# Altium PCB LoRA_PCB_v2.PcbDoc
Units mm, origin at the board's own origin, x right, y up, seen from the top; angles counter-clockwise.
Board outline 34.29 x 31.77 mm, 2 copper layers (Top Layer, Bottom Layer); 44 components, 37 nets, 134 pads, 155 vias.
Unrouted connection lines stored in the file: 2.
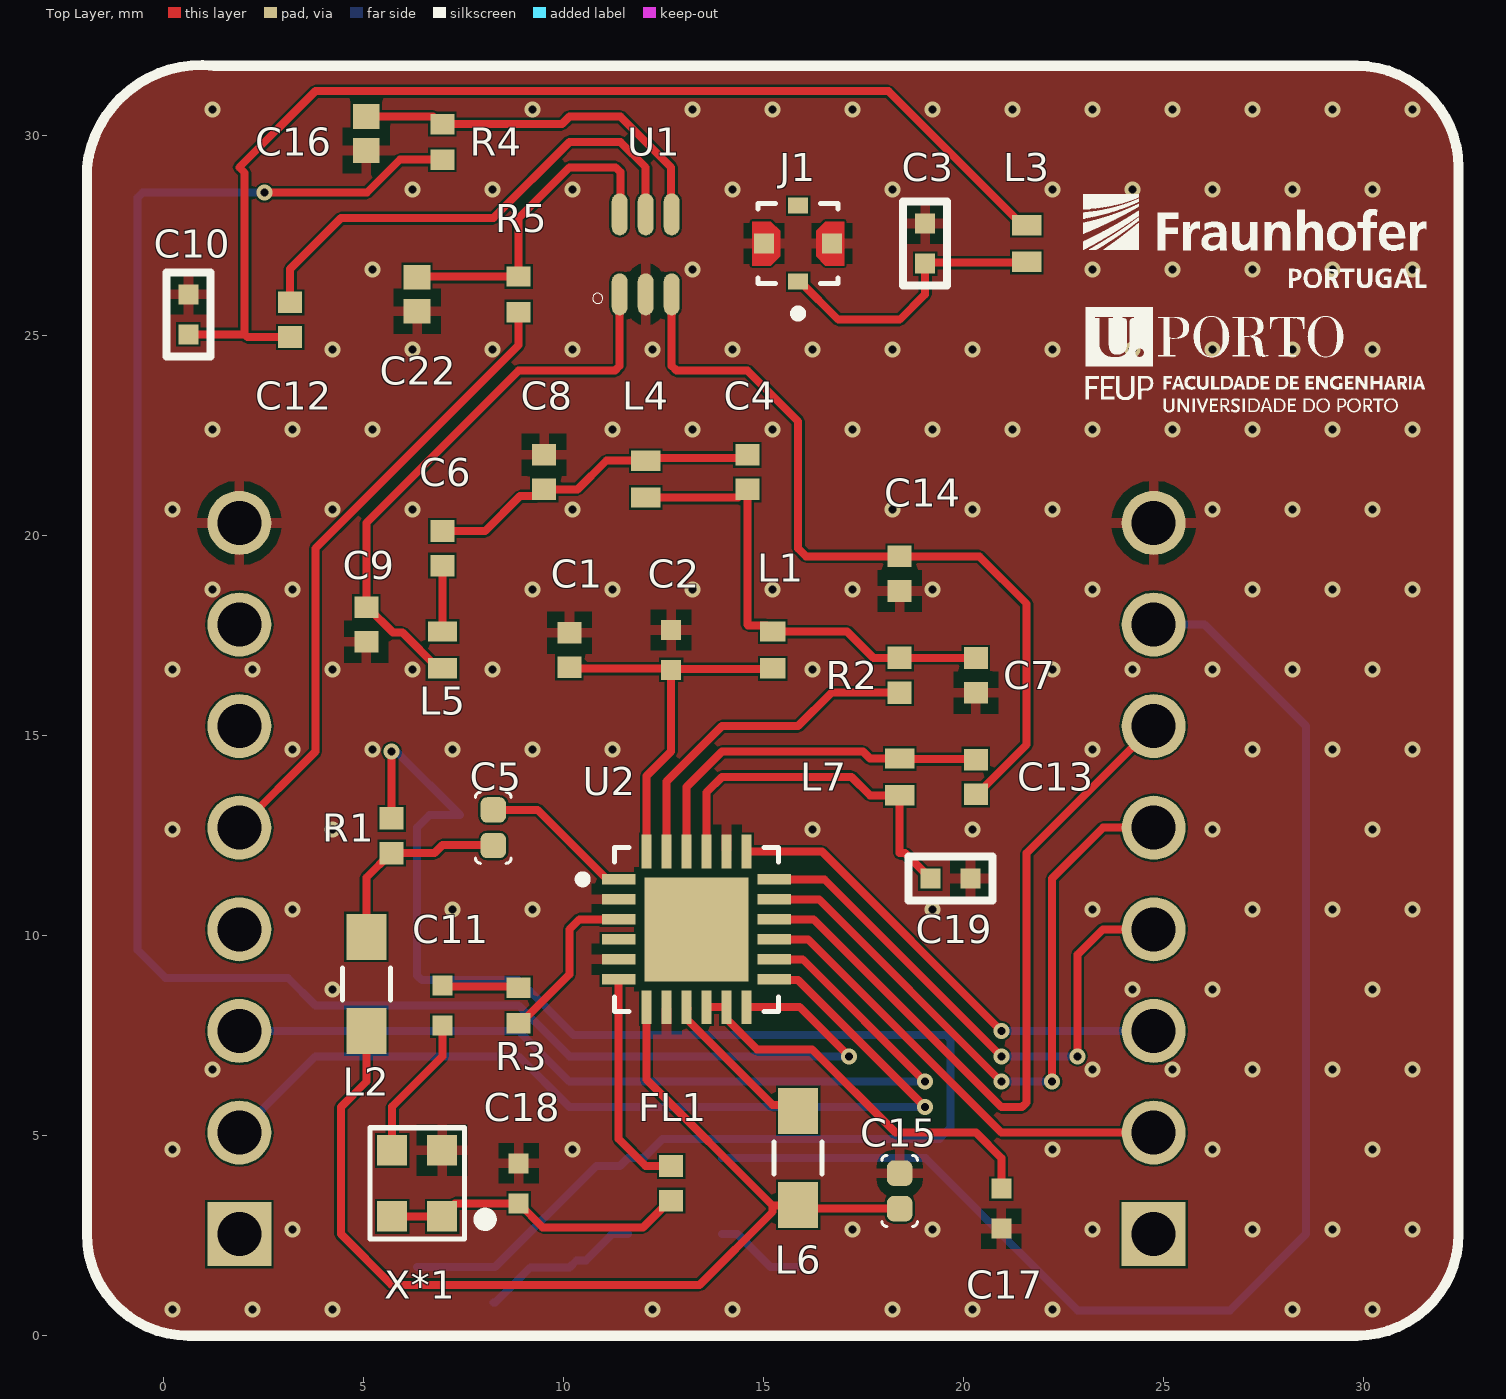
[diagram p0: Top Layer view]
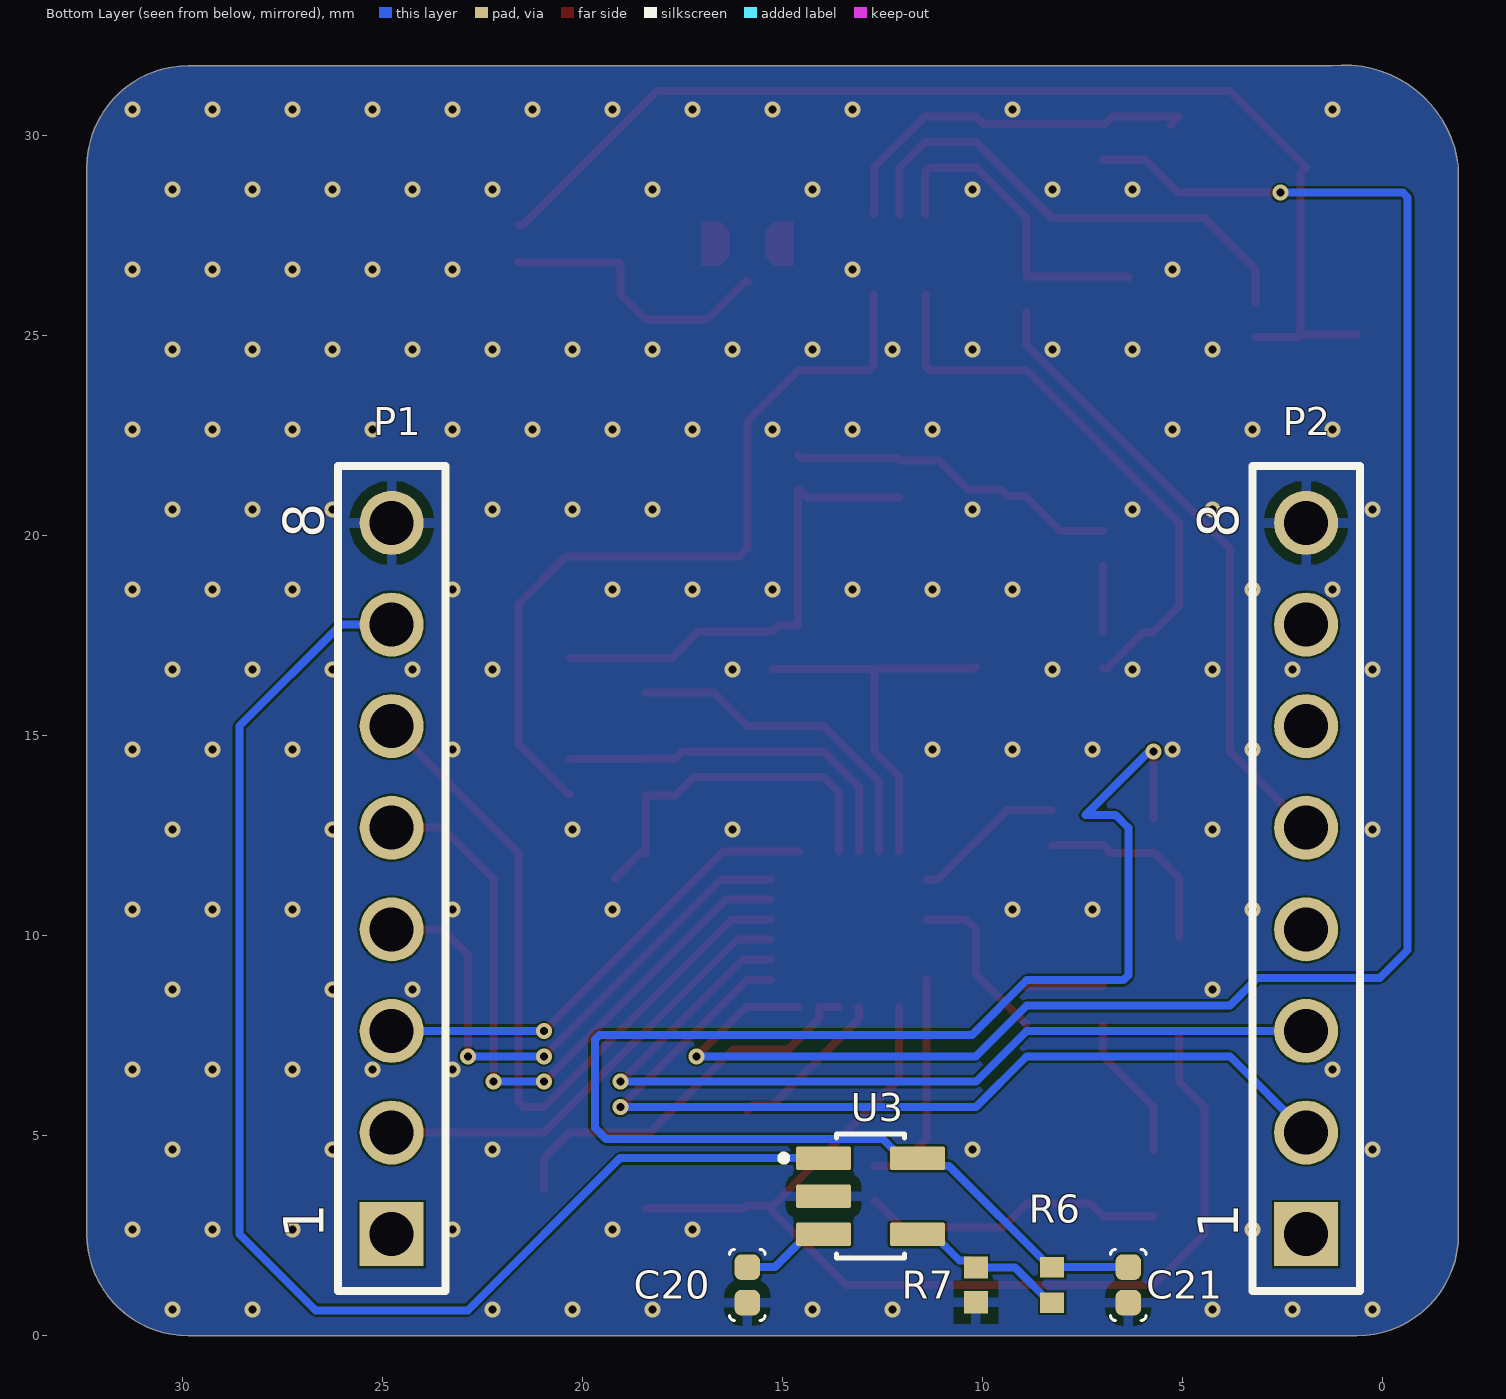
[diagram p1: Bottom Layer view, seen from below]
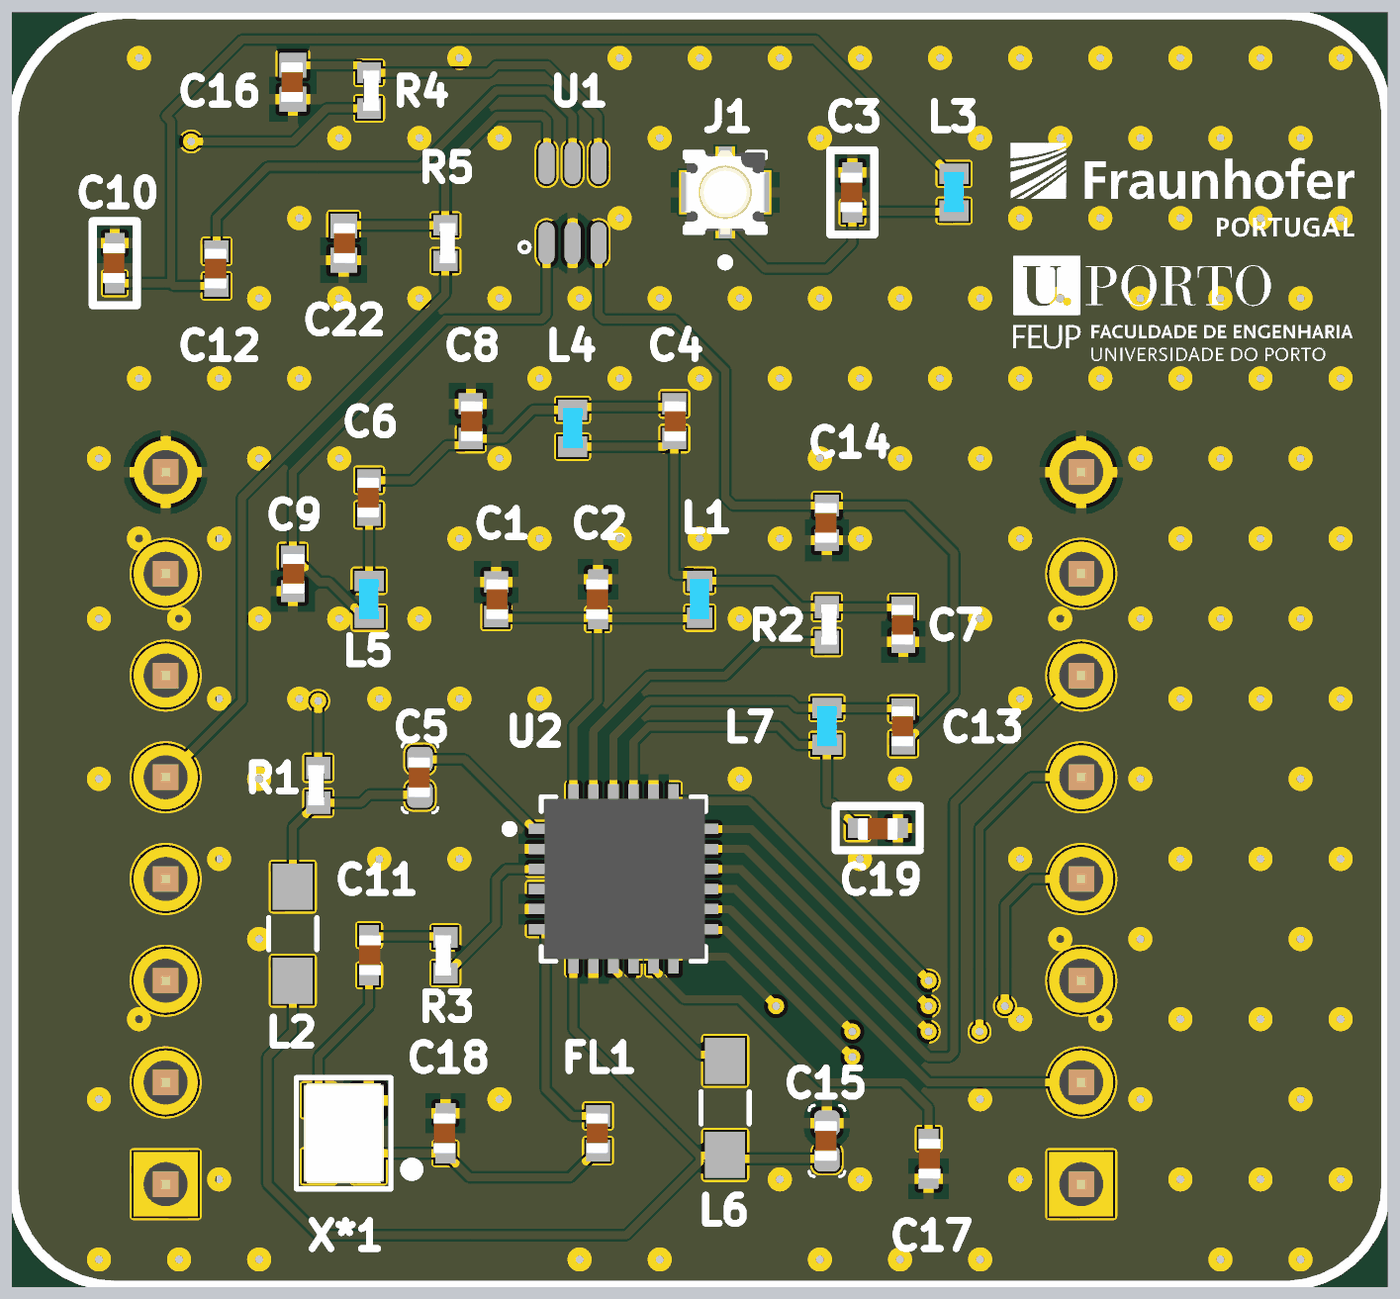
[diagram p2: 3D render of the assembled board from above, using the file's embedded part models]
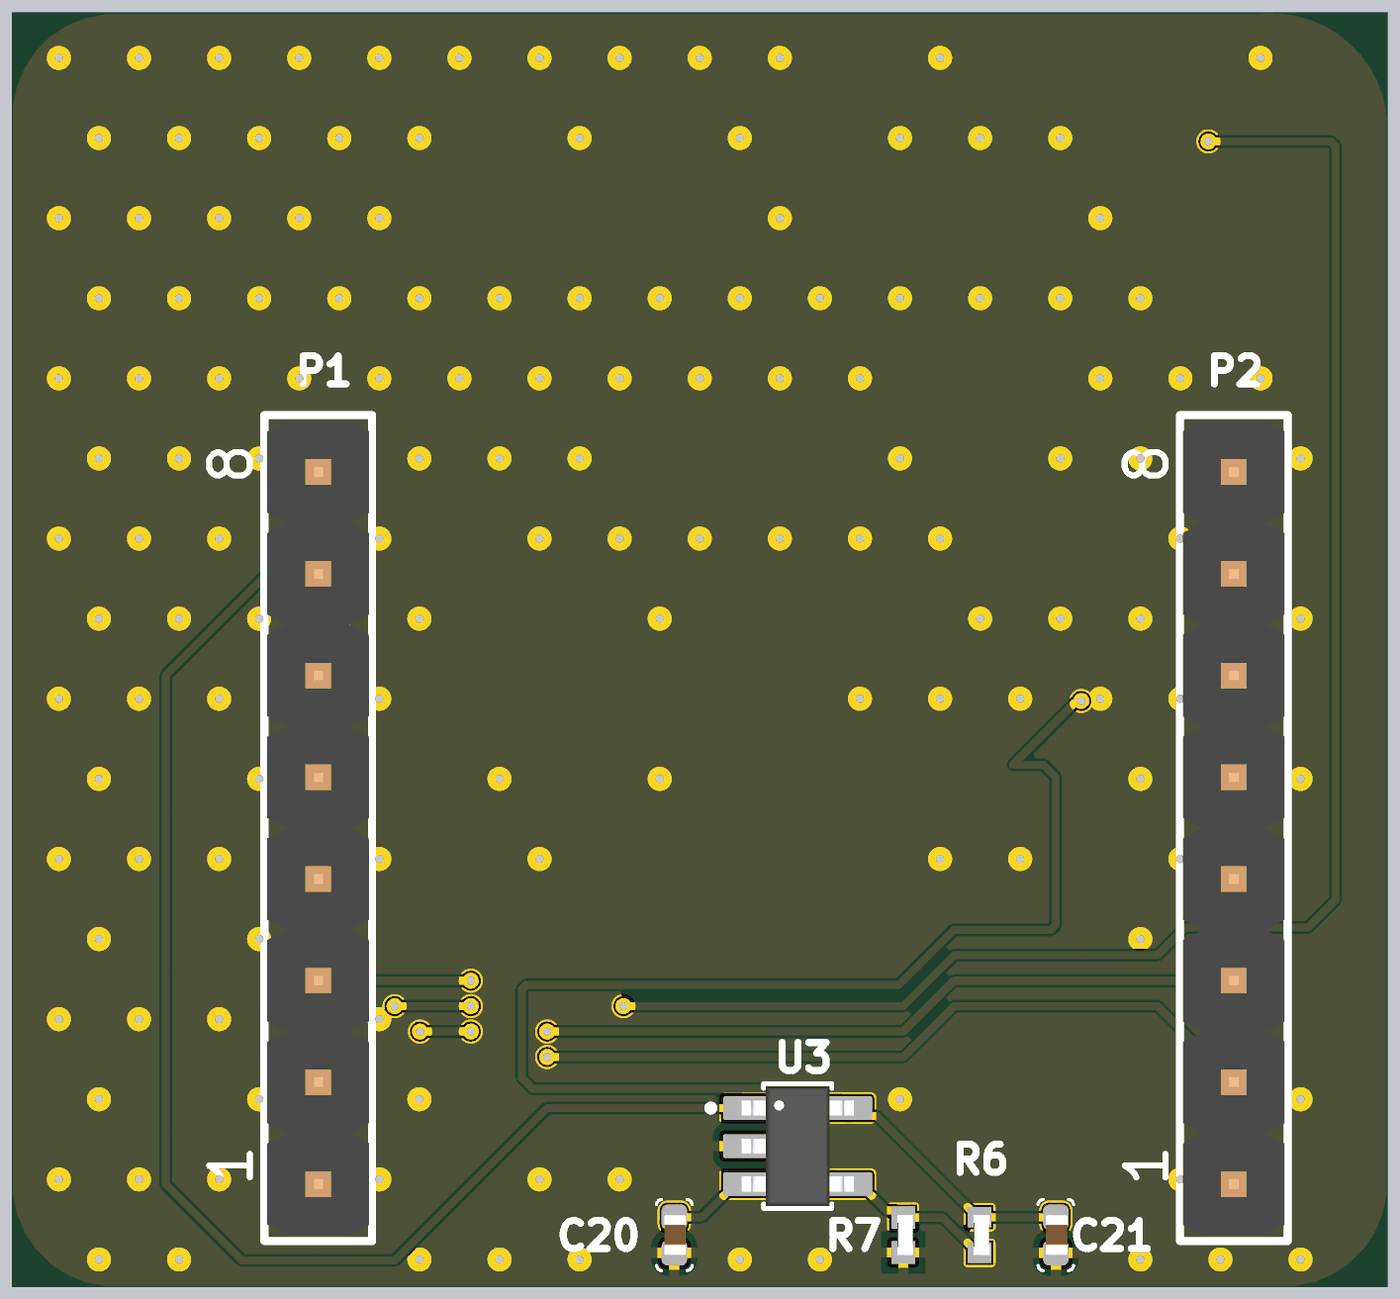
[diagram p3: 3D render of the assembled board from below, using the file's embedded part models]

## Layer stack, top to bottom
Top Solder: solder mask 0.0102, Solder Resist, Dk 3.5
Top Layer: signal copper 0.0356
Dielectric 1: dielectric 0.32, FR-4, Dk 4.8
Bottom Layer: signal copper 0.0356
Bottom Solder: solder mask 0.0102, Solder Resist, Dk 3.5

## Board outline
-1.905,2.54 ccw(c0.635,2.54) 0.635,0 29.845,0 ccw(c29.845,2.54) 32.385,2.54 32.385,29.21 ccw(c29.845,29.21) 29.845,31.75 1.27,31.75 ccw(c0.952,28.892) -1.905,29.21

## Design rules (kind name [scope] priority, off if disabled: settings)
Clearance [All] p1: gap=0.05 ignorepadtopadclearanceinfootprint=FALSE
PolygonConnect [All] p1: connectstyle=Relief reliefconductorwidth=0.254 reliefentries=4 polygonreliefangle="90 Angle" airgapwidth=0.254
RoutingVias [All] p1: holewidth=0.2 width=0.4 viastyle="Through Hole" minholewidth=0.15 minwidth=0.4 maxholewidth=0.3 maxwidth=0.6
SolderMaskExpansion [All] p1: expansion=0.102 istentingtop=FALSE
UnRoutedNet [All] p1: checkbadconnections=TRUE
Width [All] p1: maxlimit=1 minlimit=0.1 preferedwidth=0.2
29 further rules are at their usual default settings.

## Classes and differential pairs
component class Mikrobus_v2: C20 C21 P1 P2 R6 U3
component class LoRA_Schematic_v2: C1 C2 C3 C4 C5 C6 C7 C8 C9 C10 C11 C12 C13 C14 C15 C16 C17 C18 C19 C22 FB1 FL1 J1 L1 L2 L3 L4 L5 L6 L7 L8 R1 R2 R3 R4 R5 U1 U2 X*1

## Components (designator, comment, footprint, x,y, rotation, side; value= is the part's Value field where it differs from the comment)
C1 "0.047uF" CAPC1005X55N 10.16,17.145 r270 top
C2 "47pF" WCAP-CSGP_885012005059 12.7,17.145 r270 top
C3 "3.3pF" WCAP-CSRF_885392005011 19.05,27.305 r90 top
C4 "0.1pF" CAPC1005X55N 14.605,21.59 r270 top
C5 "1uF" C0402 8.255,12.7 r0 top
C6 "39pF" CAPC1005X55N 6.985,19.685 r90 top
C7 "TBD" CAPC1005X55N 20.32,16.51 r90 top
C8 "5.6pF" CAPC1005X55N 9.525,21.59 r270 top
C9 "2.2pF" CAPC1005X55N 5.08,17.78 r270 top
C10 "3.3pF" WCAP-CSRF_885392005011 0.635,25.535 r90 top
C11 "10pF" WCAP-CSGP_885012005055 6.985,8.255 r270 top
C12 "39pF" CAPC1005X55N 3.175,25.4 r90 top
C13 "2.4pF" CAPC1005X55N 20.32,13.97 r90 top
C14 "TBD" CAPC1005X55N 18.415,19.05 r90 top
C15 "470nF" C0402 18.415,3.619 r0 top
C16 "1nF" CAPC1005X56N 5.08,30.055 r90 top
C17 "0.1uF" WCAP-CSGP_885012205037 20.955,3.175 r90 top
C18 "0.1uF" WCAP-CSGP_885012205037 8.89,3.81 r270 top
C19 "1.8pF" WCAP-CSRF_885392005008 19.685,11.43 r180 top
C20 "1uF" C0402 15.875,1.27 r0 bottom
C21 "1uF" C0402 6.35,1.27 r0 bottom
C22 "1nF" CAPC1005X56N 6.35,26.035 r270 top
FL1 "BLM15PG100SN1D" BEADC1005X55N 12.7,3.81 r270 top
J1 "MM8030-2610RJ3" MURATA_MM8030-2610RJ3 15.875,27.305 r180 top
L1 "47nH" INDC1005X60N 15.24,17.145 r270 top
L2 "TBD" INDC2012X87N 5.08,8.795 r90 top
L3 "9.1nH" INDC1006X60N 21.59,27.305 r270 top
L4 "2.5nH" INDC1006X60N 12.065,21.415 r90 top
L5 "4.7nH" INDC1006X60N 6.985,17.145 r270 top
L6 "15uH" INDC2012X87N 15.875,4.445 r90 top
L7 "15nH" INDC1006X60N 18.415,13.97 r90 top
P1 "61300811121" 61300811121 24.765,11.43 r90 bottom
P2 "61300811121" 61300811121 1.905,11.43 r90 bottom
R1 "0 Ohm" RESC1005X35N 5.715,12.5 r270 top
R2 "0 Ohm" RESC1005X35N 18.415,16.51 r90 top
R3 "220 Ohm" RESC1005X40N 8.89,8.255 r270 top
R4 "100" RESC1005X40N 6.985,29.845 r90 top
R5 "100" RESC1005X40N 8.89,26.035 r90 top
R6 "1020 Ohm" RESC1005X40N 8.255,1.27 r90 bottom
R7 "250 Ohm" RESC1005X35N 10.16,1.27 r90 bottom
U1 "PE4259" PCBComponent_1 10.543,24.876 r90 top
U2 "SM1262IMLTRT" SX 13.335,10.16 r0 top
U3 "AP7331" SOT95P285X145-5N 12.795,3.49 r180 bottom
X*1 "ECS-TXO-2520MV-320-AY-TR" OSCDFN250X200X89-4N 6.35,3.81 r180 top

## Footprints (in the part's own frame and the unit in brackets; to place one, negate y for a bottom-side part, rotate by r counter-clockwise, add the part's x,y. Pads: shape width x height; smd on the part's side, far side on the other; paste and mask are expansions set on the pad)
61300811121 [mm] "Pin Header, pitch 2.54 mm, THT, Vertical, single row, 8p"
  rect 1.6x1.6 hole 1.1: 1(-8.89,0)
  round 1.6 hole 1.1: 2(-6.35,0) 3(-3.81,0) 4(-1.27,0) 5(1.27,0) 6(3.81,0) 7(6.35,0) 8(8.89,0)
  silkscreen extent -10.31,-1.35 10.31,1.35, body extent -10.16,-1.27 10.16,1.27, height 8.57
BEADC1005X55N [mm]
  rect 0.54x0.6 smd: 1(-0.432,0) 2(0.432,0)
  body extent -0.5,-0.3 0.5,0.25, height 0.25
C0402 [mil]
  rrect50% 25x25 smd: 1(0,17.5) 2(0,-17.5)
  silkscreen extent -18,-35 18,35, body extent -12,-20 10,20, height 10
CAPC1005X55N [mm]
  rect 0.54x0.6 smd: 1(-0.432,0) 2(0.432,0)
  body extent -0.5,-0.25 0.5,0.3, height 0.25
CAPC1005X56N [mm]
  rect 0.62x0.67 smd: 1(-0.425,0) 2(0.425,0)
  body extent -0.5,-0.25 0.5,0.3, height 0.25
INDC1005X60N [mm]
  rect 0.51x0.63 smd: 1(-0.46,0) 2(0.46,0)
  body extent -0.5,-0.25 0.5,0.25, height 0.6
INDC1006X60N [mm]
  rect 0.51x0.73 smd: 1(-0.46,0) 2(0.46,0)
  body extent -0.5,-0.25 0.5,0.25, height 0.6
INDC2012X87N [mm]
  rect 1.15x1 smd: 1(-1.175,0) 2(1.175,0)
  silkscreen extent -0.4,-0.6 0.4,0.6
MURATA_MM8030-2610RJ3 [mm]
  rect 0.5x0.4 smd paste-1 mask+0: 1(0,0.95) 2(0,-0.95)
  rect 0.5x0.5 smd paste-1 mask+0: 3(-0.85,0) 4(0.85,0)
  Top Layer region: -0.45,0.32 -0.45,-0.32 -0.68,-0.55 -1.15,-0.55 -1.15,0.55 -0.68,0.55
  Top Layer region: 1.15,-0.55 0.68,-0.55 0.45,-0.32 0.45,0.32 0.68,0.55 1.15,0.55
  silkscreen extent -1,-1 1,1.85, body extent -1,-1.05 1,1.05, height 0.9
OSCDFN250X200X89-4N [mm]
  rect 0.75x0.76 smd: 1(-0.625,0.825) 2(-0.625,-0.825) 3(0.625,-0.825) 4(0.625,0.825)
  silkscreen extent -1.84,-1.39 1.18,1.39, body extent -1,-1.25 1,1.25, height 0.6
PCBComponent_1 [mm]
  oval 1.05x0.4 smd: 1(1.159,-0.872) 2(1.159,-1.522) 3(1.159,-2.172) 4(3.159,-2.172) 5(3.159,-1.522) 6(3.159,-0.872)
  silkscreen extent 0.93,-0.45 1.19,-0.2
RESC1005X35N [mm]
  rect 0.56x0.6 smd: 1(-0.435,0) 2(0.435,0)
  body extent -0.5,-0.25 0.5,0.15, height 0.25
RESC1005X40N [mm]
  rect 0.51x0.6 smd: 1(-0.445,0) 2(0.445,0)
  body extent -0.5,-0.25 0.5,0.15, height 0.25
SOT95P285X145-5N [mm]
  rrect15% 1.37x0.59 smd: 1(-1.175,0.95) 2(-1.175,0) 3(-1.175,-0.95) 4(1.175,-0.95) 5(1.175,0.95)
  silkscreen extent -2.23,-1.55 0.85,1.55, body extent -1.4,-1.5 1.4,1.5, height 1.4
SX [mm]
  rect 0.84x0.26 smd: 1(-1.945,1.25) 2(-1.945,0.75) 3(-1.945,0.25) 4(-1.945,-0.25) 5(-1.945,-0.75) 6(-1.945,-1.25) 13(1.945,-1.25) 14(1.945,-0.75) 15(1.945,-0.25) 16(1.945,0.25) 17(1.945,0.75) 18(1.945,1.25)
  rect 0.26x0.84 smd: 7(-1.25,-1.945) 8(-0.75,-1.945) 9(-0.25,-1.945) 10(0.25,-1.945) 11(0.75,-1.945) 12(1.25,-1.945) 19(1.25,1.945) 20(0.75,1.945) 21(0.25,1.945) 22(-0.25,1.945) 23(-0.75,1.945) 24(-1.25,1.945)
  rect 2.6x2.6 smd paste-2: 25(0,0)
  silkscreen extent -2.89,-2.05 2.05,2.05, body extent -1.97,-2 2.03,2, height 0.95
WCAP-CSGP_885012005055 [mm]
  rect 0.5x0.5 smd: 1(-0.5,0) 2(0.5,0)
  body extent -0.5,-0.25 0.5,0.3, height 0.25
WCAP-CSGP_885012005059 [mm]
  rect 0.5x0.5 smd: 1(-0.5,0) 2(0.5,0)
  body extent -0.5,-0.3 0.5,0.25, height 0.25
WCAP-CSGP_885012205037 [mm]
  rect 0.5x0.5 smd: 1(-0.5,0) 2(0.5,0)
  body extent -0.5,-0.3 0.5,0.25, height 0.25
WCAP-CSRF_885392005008 [mm]
  rect 0.5x0.5 smd: 1(-0.5,0) 2(0.5,0)
  silkscreen extent -1.05,-0.55 1.05,0.55, body extent -0.5,-0.25 0.5,0.3, height 0.25
WCAP-CSRF_885392005011 [mm]
  rect 0.5x0.5 smd: 1(-0.5,0) 2(0.5,0)
  silkscreen extent -1.05,-0.55 1.05,0.55, body extent -0.5,-0.25 0.5,0.3, height 0.25

## Part data
C1: library part GRM155R71C473KA01J, "SMD Capacitor X7R(EIA) with Capacitance: 47000pF Tol. 10%. Rated Voltage: 16Vdc", Package=0402, MF=muRata, MF number=GRM155R71C473KA01J, MP=GRM155R71C473KA01J, Price=None
C2: library part 885012005059, "<b> WCAP-CSGP Ceramic Capacitors <br> <br> <br><b>Characteristics </b><br> </b><br>Multilayer Ceramic Chip Capacitor <br>Recommended soldering:Reflow, for 0603 and 0805 wave soldering is also allowed <br>Operating temperature:-55 Â°C to +125 Â°C; <br>Ceramic characteristics: Class I - NPO ; Class II -X7R, X5R <br>High performance ceramic <br>High capacitance stability <br>Minimal aging  <br>Termination:Cu/Ni/Sn <br>   <br><a href=\"http://katalog.we-online.de/media/images/eisos/WCAP-CSGP_pf2.jpg\" title=\"Enlarge picture\"> <img src=\"http://katalog.we-online.de/media/thumbs2/eisos/thb_WCAP-CSGP_pf2.jpg\" width=\"320\"></a><p> Details see: <a href=\"http://katalog.we-online.de/en/pbs/WCAP-CSGP-0402?\">http://katalog.we-online.de/en/pbs/WCAP-CSGP-0402? </a><p>Created:  2015-01-28 <br>2015 (C) Wurth Elektronik", Package=0402, MF=wurth, MF number=885012005059, MP=885012005059, Price=None
C3 C10: library part 885392005011, "<b> WCAP-CSRF Radio Frequency MLCC <br> <br> <br><b>Characteristics </b><br> </b><br>Multilayer ceramic chip capacitor <br>Recommended soldering: Reflow <br>Operating temperature: -55 Â°C up to +125 Â°C <br>Capacitance range: 0.2 pF - 33 pF<br> Rated voltage: 25 V(DC) and 50 V(DC) <br>Size: 0201 and 0402 <br>High frequency  <br> <br> <br><b>Applications </b><br> <br>High frequency applications <br>Antenna matching  <br> <br> <br><a href=\"https://katalog.we-online.de/media/images/v2/Family_WCAP-CSRF.jpg\" title=\"Enlarge picture\"> <img src=\"https://katalog.we-online.de/media/images/v2/Family_WCAP-CSRF.jpg\" width=\"320\"></a><p> Details see: <a href=\"https://katalog.we-online.de/en/pbs/WCAP-CSRF#vs_ct:2\">https://katalog.we-online.de/en/pbs/WCAP-CSRF#vs_ct:2<br> <br></a><p>Created By Yingchun,Shan 2018-11-14 <br><br>20178(C) Wurth Elektronik", Package=0402, Availability=Unavailable, MF=Wurth, MP=885392005011, Price=None
C4: library part CC0402BRNPO9BN3R3, "0402 3.3 pF 50 V Â±0.1 pF Tolerance NP0 SMT Multilayer Ceramic Capacitor", Package="0402 Yageo", Availability=Good, Check_prices=https://www.snapeda.com/parts/CC0402BRNPO9BN3R3/Yageo/view-part/1821368/?ref=eda, MF=Yageo, MP=CC0402BRNPO9BN3R3, Price=None, Purchase-URL=https://pricing.snapeda.com/search/part/CC0402BRNPO9BN3R3/?ref=eda, SnapEDA_Link=https://www.snapeda.com/parts/CC0402BRNPO9BN3R3/Yageo/view-part/1821368/?ref=snap
C5 C20 C21: library part CERAMIC-1UF-10V-10%-X5R(0402), "1ÂµF Â±10% 10V Ceramic Capacitor X5R 0402 _1005 Metric_", Package="0402 Yageo", Availability=Unavailable, MF=Yageo, MP=CC0402KRX5R6BB105, Price=None, SnapEDA_Link=https://www.snapeda.com/parts/CC0402KRX5R6BB105/Yageo/view-part/105546/?ref=snap
C6 C12: library part C0402C390J5GAC, Package=None, Availability=Unavailable, MP=C0402C390J5GAC, Price=None
C7 C14: library part VJ0402A5R6CXAPW1BC, Package="0402 Vishay", Availability="In Stock", MF=Vishay, Price=None
C8: library part VJ0402A5R6CXAPW1BC, "Cap Ceramic 5.6pF 50V C0G 0.25pF SMD 0402 125Â°C Paper T/R", Package="0402 Vishay", Availability="In Stock", Check_prices=https://www.snapeda.com/parts/VJ0402A5R6CXAPW1BC/Vishay/view-part/?ref=eda, MF=Vishay, MP=VJ0402A5R6CXAPW1BC, Price=None, Purchase-URL=https://pricing.snapeda.com/search/part/VJ0402A5R6CXAPW1BC/?ref=eda, SnapEDA_Link=https://www.snapeda.com/parts/VJ0402A5R6CXAPW1BC/Vishay/view-part/?ref=snap
C9: library part CC0402BRNPO9BN2R2, "CAP CER 2.2PF 50V C0G/NPO 0402", Package=0402, Availability=», MF=YAGEO, MP=CC0402BRNPO9BN2R2, Price=None
C11: library part 885012005055, "<b> WCAP-CSGP Ceramic Capacitors <br> <br> <br><b>Characteristics </b><br> </b><br>Multilayer Ceramic Chip Capacitor <br>Recommended soldering:Reflow, for 0603 and 0805 wave soldering is also allowed <br>Operating temperature:-55 Â°C to +125 Â°C; <br>Ceramic characteristics: Class I - NPO ; Class II -X7R, X5R <br>High performance ceramic <br>High capacitance stability <br>Minimal aging  <br>Termination:Cu/Ni/Sn <br>   <br><a href=\"http://katalog.we-online.de/media/images/eisos/WCAP-CSGP_pf2.jpg\" title=\"Enlarge picture\"> <img src=\"http://katalog.we-online.de/media/thumbs2/eisos/thb_WCAP-CSGP_pf2.jpg\" width=\"320\"></a><p> Details see: <a href=\"http://katalog.we-online.de/en/pbs/WCAP-CSGP-0402?\">http://katalog.we-online.de/en/pbs/WCAP-CSGP-0402? </a><p>Created:  2015-01-28 <br>2015 (C) Wurth Elektronik", Package=None, Availability=Unavailable, MP=885012005055, Price=None
C13: library part CC0402BRNPO9BN2R4, "2.4pF Â±0.1pF 50V Ceramic Capacitor C0G, NP0 0402 (1005 Metric)", Package="0402 Yageo", Availability=Good, Check_prices=https://www.snapeda.com/parts/CC0402BRNPO9BN2R4/Yageo/view-part/1824876/?ref=eda, MF=Yageo, MP=CC0402BRNPO9BN2R4, Price=None, Purchase-URL=https://pricing.snapeda.com/search/part/CC0402BRNPO9BN2R4/?ref=eda, SnapEDA_Link=https://www.snapeda.com/parts/CC0402BRNPO9BN2R4/Yageo/view-part/1824876/?ref=snap
C15: library part CERAMIC-470NF-10V-10%-X5R(0402), "0.47ÂµF Â±10% 10V Ceramic Capacitor X5R 0402 (1005 Metric)", Package="0402 Yageo", Arrow_Americas-Purchase-URL=https://snapeda.com/shop?store=Arrow+Americas&id=105580, Availability=Unavailable, DigiKey-Purchase-URL=https://snapeda.com/shop?store=DigiKey&id=105580, MF=Yageo, Mouser-Purchase-URL=https://snapeda.com/shop?store=Mouser&id=105580, MP=CC0402KRX5R6BB474, Price=None, SnapEDA_Link=https://www.snapeda.com/parts/CC0402KRX5R6BB474/Yageo/view-part/105580/?ref=snap
C16 C22: library part 0402ZD102KAT2A, "Ceramic Multilayer Capacitor; Capacitor Type:General Purpose; Capacitance:1000pF; Capacitance Tolerance:Â± 10%; Voltage Rating:10VDC; Capacitor Dielectric Type:Multilayer Ceramic; Package/Case:0402; Termination Type:SMD ;RoHS Compliant: Yes", Package=0402, Availability=Unavailable, MF=AVX, MP=0402ZD102KAT2A, Price=None
C17 C18: library part 885012205037, "WCAP-CSGP General Purpose MLCC; SMT 0402; X7R; 100nF 10%; 16V; -55C to +125C; Tech. PN X7R0402104K016DFCT10000", Package="0402 Wurth Electronics", Availability=Warning, BuyPart=https://www.snapeda.com/parts/885012205037/Wurth%20Electronics%20Inc/view-part/4217417/?ref=eda, DigiKey-Purchase-URL=https://snapeda.com/shop?store=DigiKey&id=4217417, MF="Wurth Electronics Inc", Mouser-Purchase-URL=https://snapeda.com/shop?store=Mouser&id=4217417, MP=885012205037, Price=None, SnapEDA_Link=https://www.snapeda.com/parts/885012205037/Wurth%20Electronics%20Inc/view-part/4217417/?ref=snap
C19: library part 885392005008, "<b> WCAP-CSRF Radio Frequency MLCC <br> <br> <br><b>Characteristics </b><br> </b><br>Multilayer ceramic chip capacitor <br>Recommended soldering: Reflow <br>Operating temperature: -55 Â°C up to +125 Â°C <br>Capacitance range: 0.2 pF - 33 pF<br> Rated voltage: 25 V(DC) and 50 V(DC) <br>Size: 0201 and 0402 <br>High frequency  <br> <br> <br><b>Applications </b><br> <br>High frequency applications <br>Antenna matching  <br> <br> <br><a href=\"https://katalog.we-online.de/media/images/v2/Family_WCAP-CSRF.jpg\" title=\"Enlarge picture\"> <img src=\"https://katalog.we-online.de/media/images/v2/Family_WCAP-CSRF.jpg\" width=\"320\"></a><p> Details see: <a href=\"https://katalog.we-online.de/en/pbs/WCAP-CSRF#vs_ct:2\">https://katalog.we-online.de/en/pbs/WCAP-CSRF#vs_ct:2<br> <br></a><p>Created By Yingchun,Shan 2018-11-14 <br><br>20178(C) Wurth Elektronik", Package=None, Availability=Unavailable, MP=885392005008, Price=None
FL1: "FERRITE, BEAD, 0402, 0.025OHM, 1A", Package=None, Availability=Unavailable, MP=BLM15PG100SN1D, Price=None
J1: "SWG Connector Receptacle, Female Socket 50Ohm Surface Mount Solder", Package=None, Digi-Key_Part_Number=490-5907-1-ND, Digi-Key_Purchase_URL=https://www.digikey.com/product-detail/en/murata-electronics/MM8030-2610RJ3/490-5907-1-ND/3635133?utm_source=snapeda&utm_medium=aggregator&utm_campaign=symbol, MF=Murata, MP=MM8030-2610RJ3, SnapEDA_Link=https://www.snapeda.com/parts/MM8030-2610RJ3/Murata%20Electronics%20North%20America/view-part/271470/?ref=snap
L1: library part LQW15AN47NJ00D, "LQW15 Series 0402 47 nH Â±5 % 210 mA 1.08 Ohm SMT Unshielded Wirewound Inductor", Package=0402, Availability=Unavailable, MF=Murata, MP=LQW15AN47NJ00D, Price=None
L2: library part MLZ2012M150WT000, Package=0402, Availability=Unavailable, Price=None
L3: library part LQW15AN9N1H00D, "Inductor with Inductance: 9.1nH Tol. +/-3%, Package: 0402 (1005)", Package="1006 Murata", Availability=Good, BuyPart=https://www.snapeda.com/parts/LQW15AN9N1H00D/Murata%20Electronics%20North%20America/view-part/1510094/?ref=eda, DigiKey-Purchase-URL=https://snapeda.com/shop?store=DigiKey&id=1510094, MF=Murata, Mouser-Purchase-URL=https://snapeda.com/shop?store=Mouser&id=1510094, MP=LQW15AN9N1H00D, Price=None, SnapEDA_Link=https://www.snapeda.com/parts/LQW15AN9N1H00D/Murata%20Electronics%20North%20America/view-part/1510094/?ref=snap
L4: library part LQW15AN2N5C00D, "Inductor with Inductance: 2.5nH Tol. +/-0.2nH, Package: 0402 _1005_", Package="1006 Murata", Digi-Key_Part_Number=490-6798-1-ND, Digi-Key_Purchase_URL=https://www.digikey.com.tr/product-detail/en/murata-electronics/LQW15AN2N5C00D/490-6798-1-ND/3845995?utm_source=snapeda&utm_medium=aggregator&utm_campaign=symbol, MF=Murata, MP=LQW15AN2N5C00D, SnapEDA_Link=https://www.snapeda.com/parts/LQW15AN2N5C00D/Murata%20Electronics%20North%20America/view-part/1500635/?ref=snap
L5: library part LQW15AN4N7C00D, "INDUCTOR, 0402, 4.7NH; Inductor Type:Chip Coils; Inductance Tolerance:Â± 0.2nH; Resistance:0.07ohm; DC Current Max:750mA; Case Style:0402; Q Factor @ Vr, F:25; Core Material:Alumina; External Depth:0.6mm; External Length / ;RoHS Compliant: Yes", Package=None, Availability=Unavailable, MF=Murata, MP=LQW15AN4N7C00D, Price=None
L6: library part MLZ2012M150WT000, "Surface Mount High Frequency Inductor, MLZ Series, 15 H, 20%, 0805 [2012 Metric], 22 MHz", Package=0402, Availability=Unavailable, MF=TDK-Lambda, MP=MLZ2012M150WT000, Price=None
L7: library part LQW15AN15NH00D, "Inductor with Inductance: 15nH Tol. +/-3%, Package: 0402 (1005)", Package="1006 Murata", Availability=Good, Check_prices=https://www.snapeda.com/parts/LQW15AN15NH00D/Murata%20Electronics%20North%20America/view-part/1499752/?ref=eda, DigiKey-Purchase-URL=https://snapeda.com/shop?store=DigiKey&id=1499752, MF=Murata, Mouser-Purchase-URL=https://snapeda.com/shop?store=Mouser&id=1499752, MP=LQW15AN15NH00D, Price=None, SnapEDA_Link=https://www.snapeda.com/parts/LQW15AN15NH00D/Murata%20Electronics%20North%20America/view-part/1499752/?ref=snap
P1 P2: library part CMP-1502-01076-1, "THT Vertical Pin Header WR-PHD, Pitch 2.54 mm, Single Row, 8 pins", Contact Resistance=20mOhm, Manufacturer="Wurth Elektronik", Operating Temperature=-40to105degC, Rated Current=3A, Withstanding Voltage=500VAC, Working Voltage=250VAC, Datasheet URL=https://katalog.we-online.de/em/datasheet/6130xx11121.pdf, Gender=Male, Manufacturer URL=http://www.we-online.de, Mounting Technology=THT, Orientation=Vertical, Package Reference=61300811121, Packaging=Bag, Part Number=61300811121, Pin Number=8, Pitch=2.54mm, Publisher=WurthElektronik, Row Number=Single
R1 R2: library part CRCW04020000Z0EDC, "0 Ohms Jumper 0.063W, 1/16W Chip Resistor 0402 (1005 Metric) Thick Film", Package="1005 Yageo", Check_prices=https://www.snapeda.com/parts/CRCW04020000Z0EDC/Vishay%20Dale/view-part/3593962/?ref=eda, Digi-Key_Part_Number=541-4062-1-ND, DigiKey-Purchase-URL=https://snapeda.com/shop?store=DigiKey&id=3593962, MF="Vishay Dale", Mouser-Purchase-URL=https://snapeda.com/shop?store=Mouser&id=3593962, MP=CRCW04020000Z0EDC, SnapEDA_Link=https://www.snapeda.com/parts/CRCW04020000Z0EDC/Vishay%20Dale/view-part/3593962/?ref=snap
R3: library part CRCW0402220RJNED, "Res Thick Film 0402 220 Ohm 5% 1/16W Â±200ppm/Â°C Molded SMD SMD Paper T/R", Package=None, Availability=Unavailable, MP=CRCW0402220RJNED, Price=None
R4 R5: library part CRCW0402100RFKTD, "Res Thick Film 0402 100 Ohm 1% 1/16W Â±100ppm/Â°C Molded SMD SMD Paper T/R", Package=0402, MP=CRCW0402100RFKTD, Price=None
R6: library part CRCW04021K02FKTD, "Res Thick Film 0402 1.02K Ohm 1% 1/16W Â±100ppm/Â°C Molded SMD SMD Paper T/R", Package=None, Availability=Unavailable, MP=CRCW04021K02FKTD, Price=None
R7: library part CRCW0402255RFKEDC, Package=None, Availability=Unavailable, MP=CRCW0402255RFKEDC, Price=None
U1: "UltraCMOSÂ® Switch, SPDT For Use With PE4259", Package="SOT-363 Peregrine Semiconductor", MF=pSemi, MP=PE4259
U2: library part SM1262, "IC RF TxRx Only General ISM < 1GHz LoRaWAN 150MHz ~ 960MHz 24-VFQFN Exposed Pad", MP=1262IMLTRT
U3: library part AP7331-18WG-7, "Linear Voltage Regulator IC 1 Output 300mA SOT-25", Package="SOT-753 Diodes Inc.", Availability=Unavailable, MF="Diodes Inc.", MP=AP7331-18WG-7, Price=None, SnapEDA_Link=https://www.snapeda.com/parts/AP7331-18WG-7/Diodes%20Inc./view-part/494406/?ref=snap
X*1: library part TXCO, "32MHz TCXO CMOS Oscillator 1.7V ~ 3.6V Enable/Disable 4-SMD, No Lead"

## Via types
v1: diameter 0.4, hole 0.2, Top Layer to Bottom Layer, 155 vias

## Nets (pads, with @x,y where several pads share a name; then routed paths per layer and width w, separated by ;. In a path a pad name is that pad's centre, name@x,y a point inside that pad or via, vN(x,y) a via of type N, cw(c..) or ccw(c..) an arc to the next point about the centre after c; other vN are vias at no path point)
BUSY: P2.3 U2.14 | length 22.7
  Top Layer w0.2: U2.14 15.99,9.41 v1(19.05,6.35)
  Bottom Layer w0.2: P2.3 8.89,7.62 10.16,6.35 v1(19.05,6.35)
DCC_SW: L6.2 U2.9 | length 4.1
  Top Layer w0.2: U2.9@13.115,8.185 U2.9 13.085,7.925 15.24,5.77 15.725,5.77 L6.2
DIO1: P2.2 U2.13 | length 23.6
  Top Layer w0.2: U2.13 15.3,8.89 15.875,8.89 v1(19.05,5.715)
  Bottom Layer w0.2: P2.2 3.81,6.985 8.89,6.985 10.16,5.715 v1(19.05,5.715)
DIO2: R4.1 U2.12 | length 48.8
  Top Layer w0.2: v1(2.54,28.575) 5.092,28.575 5.917,29.4 R4.1 ; U2.12 15.915,8.215 v1(17.145,6.985)
  Bottom Layer w0.2: v1(2.54,28.575) -0.518,28.575 -0.635,28.458 -0.635,9.642 0.059,8.949 3.116,8.949 3.81,8.255 8.89,8.255 10.16,6.985 v1(17.145,6.985)
DIO3: FL1.1 U2.6 | length 5.6
  Top Layer w0.2: U2.6 11.39,4.917 12.065,4.242 FL1.1
GND: C1.1 C2.1 C3.2 C7.1 C8.1 C9.2 C10.2 C14.1 C15.1 C16.1 C17.1 C18.1 C19.1 C20.1 C21.1 C22.2 J1.3 J1.4 P1.8 P2.8 R7.1 U1.2 U2.2 U2.5 U2.8 U2.20 U2.25 U3.2 X*1.2
  other v1: 0.24,0.66 2.24,0.66 4.24,0.66 12.24,0.66 14.24,0.66 18.24,0.66 20.24,0.66 22.24,0.66 28.24,0.66 30.24,0.66 3.24,2.66 17.24,2.66 19.24,2.66 23.24,2.66 27.24,2.66 29.24,2.66 31.24,2.66 0.24,4.66 10.24,4.66 22.24,4.66 26.24,4.66 30.24,4.66 1.24,6.66 23.24,6.66 25.24,6.66 27.24,6.66 29.24,6.66 31.24,6.66 4.24,8.66 24.24,8.66 26.24,8.66 30.24,8.66 3.24,10.66 7.24,10.66 9.24,10.66 19.24,10.66 23.24,10.66 27.24,10.66 29.24,10.66 31.24,10.66 0.24,12.66 4.24,12.66 16.24,12.66 20.24,12.66 26.24,12.66 30.24,12.66 3.24,14.66 5.24,14.66 7.24,14.66 9.24,14.66 11.24,14.66 23.24,14.66 27.24,14.66 29.24,14.66 31.24,14.66 0.24,16.66 2.24,16.66 4.24,16.66 6.24,16.66 8.24,16.66 16.24,16.66 22.24,16.66 24.24,16.66 26.24,16.66 28.24,16.66 30.24,16.66 1.24,18.66 3.24,18.66 9.24,18.66 11.24,18.66 13.24,18.66 15.24,18.66 17.24,18.66 19.24,18.66 23.24,18.66 27.24,18.66 29.24,18.66 31.24,18.66 0.24,20.66 4.24,20.66 6.24,20.66 10.24,20.66 18.24,20.66 20.24,20.66 22.24,20.66 26.24,20.66 28.24,20.66 30.24,20.66 1.24,22.66 3.24,22.66 5.24,22.66 11.24,22.66 13.24,22.66 15.24,22.66 17.24,22.66 19.24,22.66 21.24,22.66 23.24,22.66 25.24,22.66 27.24,22.66 29.24,22.66 31.24,22.66 4.24,24.66 6.24,24.66 8.24,24.66 10.24,24.66 12.24,24.66 14.24,24.66 16.24,24.66 18.24,24.66 20.24,24.66 22.24,24.66 24.24,24.66 26.24,24.66 28.24,24.66 30.24,24.66 5.24,26.66 13.24,26.66 23.24,26.66 25.24,26.66 27.24,26.66 29.24,26.66 31.24,26.66 6.24,28.66 8.24,28.66 10.24,28.66 14.24,28.66 18.24,28.66 22.24,28.66 24.24,28.66 26.24,28.66 28.24,28.66 30.24,28.66 1.24,30.66 9.24,30.66 13.24,30.66 15.24,30.66 17.24,30.66 19.24,30.66 21.24,30.66 23.24,30.66 25.24,30.66 27.24,30.66 29.24,30.66 31.24,30.66
NetC3_1: C3.1 J1.1 L3.2 | length 7.2
  Top Layer w0.2: J1.1 15.925,26.355 16.88,25.4 18.415,25.4 19.05,26.035 C3.1 19.07,26.825 21.57,26.825 L3.2
NetC4_1: C4.1 C6.2 C8.2 L4.2 | length 8.4
  Top Layer w0.2: C6.2 8.052,20.117 8.925,20.99 9.357,20.99 C8.2 10.363,21.158 11.08,21.875 L4.2 12.138,21.948 14.531,21.948 C4.1
NetC4_2: C4.2 C7.2 L1.1 L4.1 R2.2 | length 12.1
  Top Layer w0.2: L4.1 14.372,20.955 14.575,21.158 C4.2 14.605,17.78 14.625,17.76 15.085,17.76 L1.1 17.1,17.605 17.76,16.945 R2.2 18.417,16.943 20.315,16.943 20.317,16.945 C7.2
NetC5_1: C5.1 U2.1 | length 3.9
  Top Layer w0.2: C5.1 9.365,13.144 11.1,11.41 U2.1
NetC5_2: C5.2 L2.2 R1.2 | length 5
  Top Layer w0.2: L2.2 5.08,11.45 5.695,12.065 R1.2 6.785,12.065 6.985,12.265 8.246,12.265 C5.2
NetC6_1: C6.1 L5.1 | length 1.6
  Top Layer w0.2: L5.1 C6.1
NetC9_1: C9.1 L5.2 U1.1 | length 14.4
  Top Layer w0.2: L5.2 6.875,16.685 5.983,17.577 5.745,17.577 5.11,18.212 C9.1 5.08,20.32 8.89,24.13 11.298,24.13 11.415,24.247 U1.1
NetC11_1: C11.1 R3.1 | length 1.9
  Top Layer w0.2: C11.1 7.012,8.728 8.862,8.728 R3.1
NetC11_2: C11.2 X*1.3 | length 3.6
  Top Layer w0.2: X*1.3 5.725,5.725 6.985,6.985 C11.2
NetC12_2: C12.2 U1.5 | length 12.5
  Top Layer w0.2: C12.2 3.175,26.67 4.445,27.94 8.255,27.94 10.16,29.845 11.43,29.845 12.065,29.21 U1.5
NetC13_1: C13.1 C14.2 U1.3 | length 20.3
  Top Layer w0.2: U1.3 12.715,24.247 12.832,24.13 14.605,24.13 15.875,22.86 15.875,19.685 16.078,19.482 C14.2 20.406,19.482 21.59,18.298 21.59,14.778 20.35,13.538 C13.1
NetC16_2: C16.2 R4.2 U1.4 | length 9.8
  Top Layer w0.2: C16.2@5.29,30.27 C16.2 6.75,30.48 6.94,30.29 R4.2 9.97,30.29 10.16,30.48 11.43,30.48 12.7,29.21 12.7,28.05 U1.4
NetC17_2: C17.2 U2.10 U2.11 | length 9.9
  Top Layer w0.2: U2.10 U2.11 14.085,7.925 14.848,7.162 16.226,7.162 18.308,5.08 20.32,5.08 20.955,4.445 C17.2
NetC18_2: C18.2 FL1.2 X*1.1 X*1.4 | length 7.6
  Top Layer w0.2: X*1.4 X*1.1 6.975,2.99 7.25,3.265 7.255,3.265 7.3,3.31 C18.2 9.491,2.709 12.001,2.709 12.67,3.378 FL1.2
NetC20_2: C20.2 P1.7 U3.1 U3.3 | length 36.8
  Bottom Layer w0.2: U3.3 14.36,2.54 15.185,1.714 C20.2 ; U3.1 19.055,4.44 22.86,0.635 26.67,0.635 28.575,2.54 28.575,15.24 26.035,17.78 P1.7
NetC21_2: C21.2 R1.1 R6.2 U3.5 | length 39.9
  Top Layer w0.2: R1.1 v1(5.715,14.605)
  Bottom Layer w0.2: v1(5.715,14.605) 5.753,14.567 5.868,14.567 7.42,13.015 6.665,13.015 6.35,12.7 6.35,9.007 6.467,8.89 8.89,8.89 10.26,7.52 19.568,7.52 19.685,7.403 19.685,5.197 19.406,4.918 12.488,4.918 12.01,4.44 U3.5 11.425,4.245 10.83,4.245 8.3,1.715 R6.2 C21.2
NetC22_1: C22.1 R5.2 U1.6 | length 8.2
  Top Layer w0.2: C22.1 6.37,26.48 R5.2 8.89,27.94 10.16,29.21 11.313,29.21 11.43,29.093 11.43,28.05 U1.6
NetP2_5: P2.5 R5.1 | length 15.8
  Top Layer w0.2: P2.5 3.81,14.605 3.81,19.685 8.89,24.765 R5.1
NetR6_1: R6.1 R7.2 U3.4 | length 4.1
  Bottom Layer w0.2: R6.1 8.3,0.825 9.18,1.705 R7.2 10.34,1.885 10.575,1.885 11.23,2.54 U3.4
Node4: C10.1 C12.1 L3.1 | length 28.7
  Top Layer w0.2: C10.1 2.041,25.035 ; C12.1 2.108,24.968 2.041,25.035 ; L3.1 21.48,27.765 18.13,31.115 3.81,31.115 1.905,29.21 2.041,29.074 2.041,25.035
NRESET: P1.2 U2.15 | length 11.5
  Top Layer w0.2: U2.15 16.125,9.91 20.955,5.08 P1.2
RFI_N: C13.2 L7.2 U2.22 | length 9.3
  Top Layer w0.2: U2.22 13.085,13.72 13.97,14.605 17.495,14.605 17.67,14.43 L7.2 18.429,14.416 20.306,14.416 C13.2
RFI_P: C19.2 L7.1 U2.21 | length 9.1
  Top Layer w0.2: U2.21 13.585,13.585 13.97,13.97 17.21,13.97 17.67,13.51 L7.1 18.415,12.065 18.55,12.065 C19.2
RFO: R2.1 U2.23 | length 8.5
  Top Layer w0.2: U2.23 12.585,13.855 13.97,15.24 15.875,15.24 16.71,16.075 R2.1
SPI_CLK: P1.4 U2.18 | length 14.1
  Top Layer w0.2: U2.18 16.53,11.41 v1(20.955,6.985) ; v1(22.86,6.985) 22.86,9.525 23.495,10.16 P1.4
  Bottom Layer w0.2: v1(20.955,6.985) v1(22.86,6.985)
SPI_SI: P1.5 U2.17 | length 17
  Top Layer w0.2: U2.17 16.395,10.91 v1(20.955,6.35) ; v1(22.225,6.35) 22.225,11.43 23.495,12.7 P1.5
  Bottom Layer w0.2: v1(20.955,6.35) v1(22.225,6.35)
SPI_SO: P1.6 U2.16 | length 19
  Top Layer w0.2: U2.16 16.26,10.41 20.955,5.715 21.473,5.715 21.59,5.832 21.59,12.065 P1.6
SPI_SS: P1.3 U2.19 | length 12
  Top Layer w0.2: U2.19 16.47,12.105 v1(20.955,7.62)
  Bottom Layer w0.2: v1(20.955,7.62) P1.3
VR_PA: C1.2 C2.2 L1.2 U2.24 | length 9.9
  Top Layer w0.2: C1.2 10.194,16.679 12.666,16.679 C2.2 ; U2.24 12.085,13.99 12.7,14.605 C2.2 ; L1.2 15.22,16.665 12.72,16.665 C2.2
VREG: C15.2 L2.1 L6.1 U2.7 | length 27.1
  Top Layer w0.2: L2.1 5.08,6.35 4.445,5.715 4.445,2.54 5.715,1.27 13.41,1.27 15.24,3.1 15.24,3.25 ; U2.7 12.085,6.405 15.24,3.25 ; C15.2 15.97,3.175 L6.1 15.855,3.25 15.24,3.25
XTA: R3.2 U2.3 | length 4.2
  Top Layer w0.2: R3.2 8.935,7.81 10.16,9.035 10.16,10.16 10.41,10.41 U2.3
pads on no net: J1.2 P1.1 P2.1 P2.4 P2.6 P2.7 U2.4

## Polygon pours and split planes (outlines as drawn)
GND on Top Layer "GND_L01_P000" (solid, remove dead copper, pour order 0): -1.905,2.54 ccw(c0.635,2.54) 0.635,0 29.845,0 ccw(c29.845,2.54) 32.385,2.54 32.385,29.21 ccw(c29.845,29.21) 29.845,31.75 1.27,31.75 ccw(c0.952,28.892) -1.905,29.21
GND on Bottom Layer "GND_L02_P001" (solid, remove dead copper, pour order 1): -1.905,2.54 ccw(c0.635,2.54) 0.635,0 29.845,0 ccw(c29.845,2.54) 32.385,2.54 32.385,29.21 ccw(c29.845,29.21) 29.845,31.75 1.27,31.75 ccw(c0.952,28.892) -1.905,29.21

## Silkscreen, mask and mechanical layers (free items; w line width, h text height)
Top Overlay:
  drawing of 82 lines, arcs and shapes, not listed

## Text inside footprints (layer, text, board x,y; h text height)
P1: Bottom Overlay "1" at 26.465,2.42 h1.02 r270; Bottom Overlay "8" at 26.465,19.94 h1.02 r270
P2: Bottom Overlay "8" at 3.605,19.94 h1.02 r270; Bottom Overlay "1" at 3.605,2.42 h1.02 r270